# Altium PCB EE02-Module.PcbDoc
Units mm, origin at the board's own origin, x right, y up, seen from the top; angles counter-clockwise.
Board outline 27 x 25.5 mm, 6 copper layers (Top, L2 (GND), L3, L4, L5 (PWR), Bottom), stack 0.956 mm thick; 95 components, 90 nets, 334 pads, 243 vias.
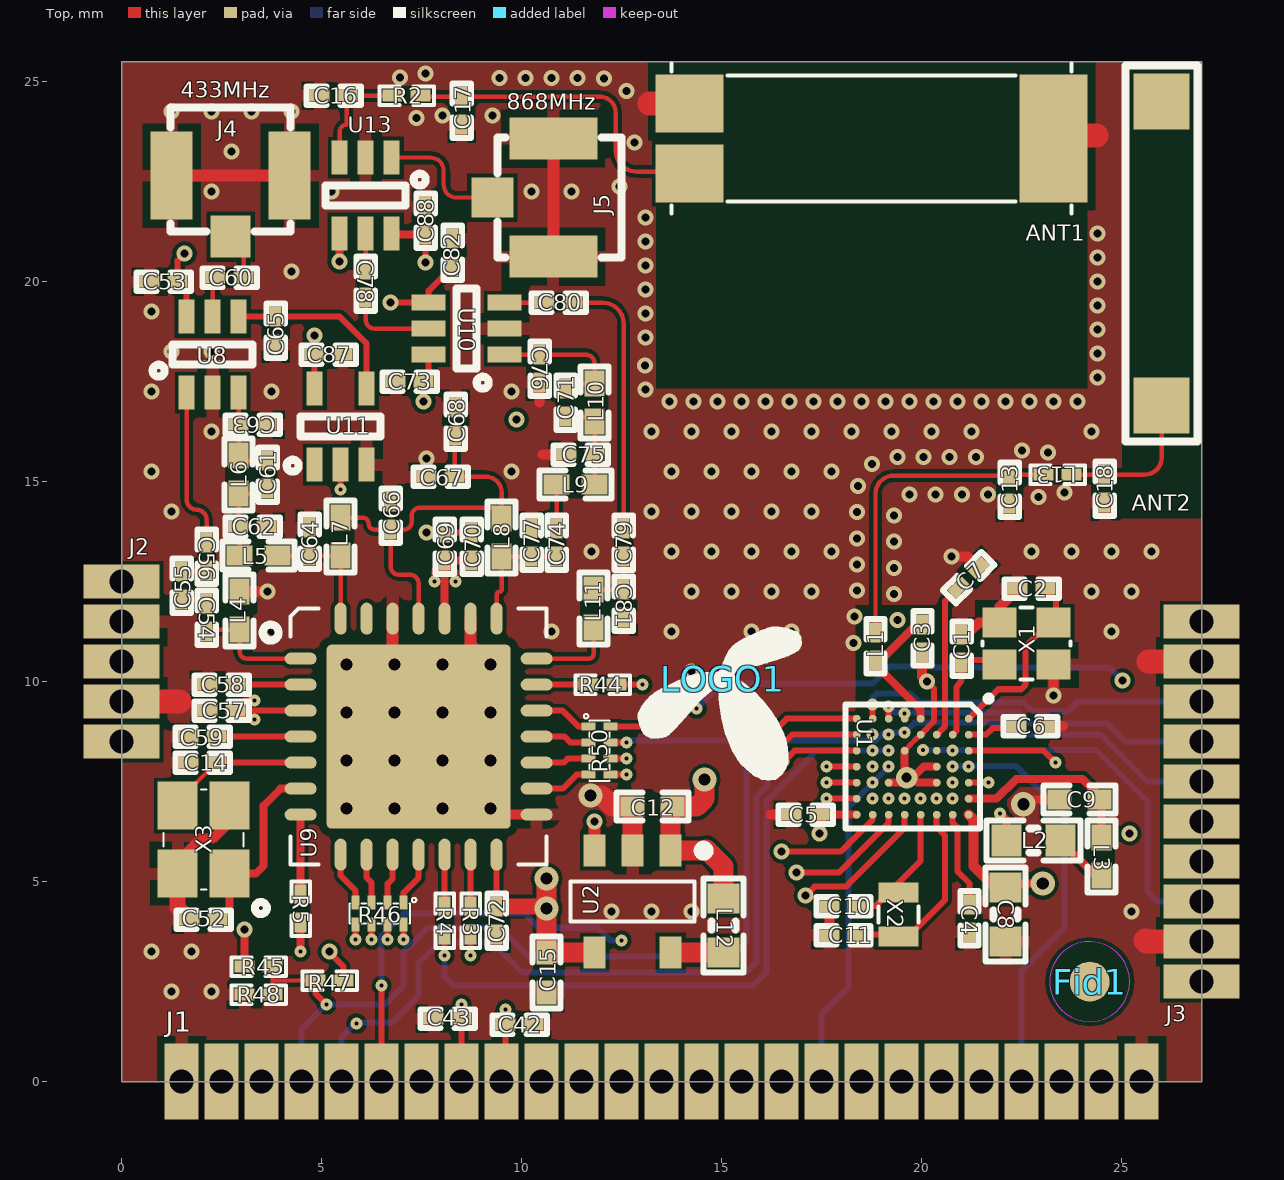
[diagram p0: Top view]
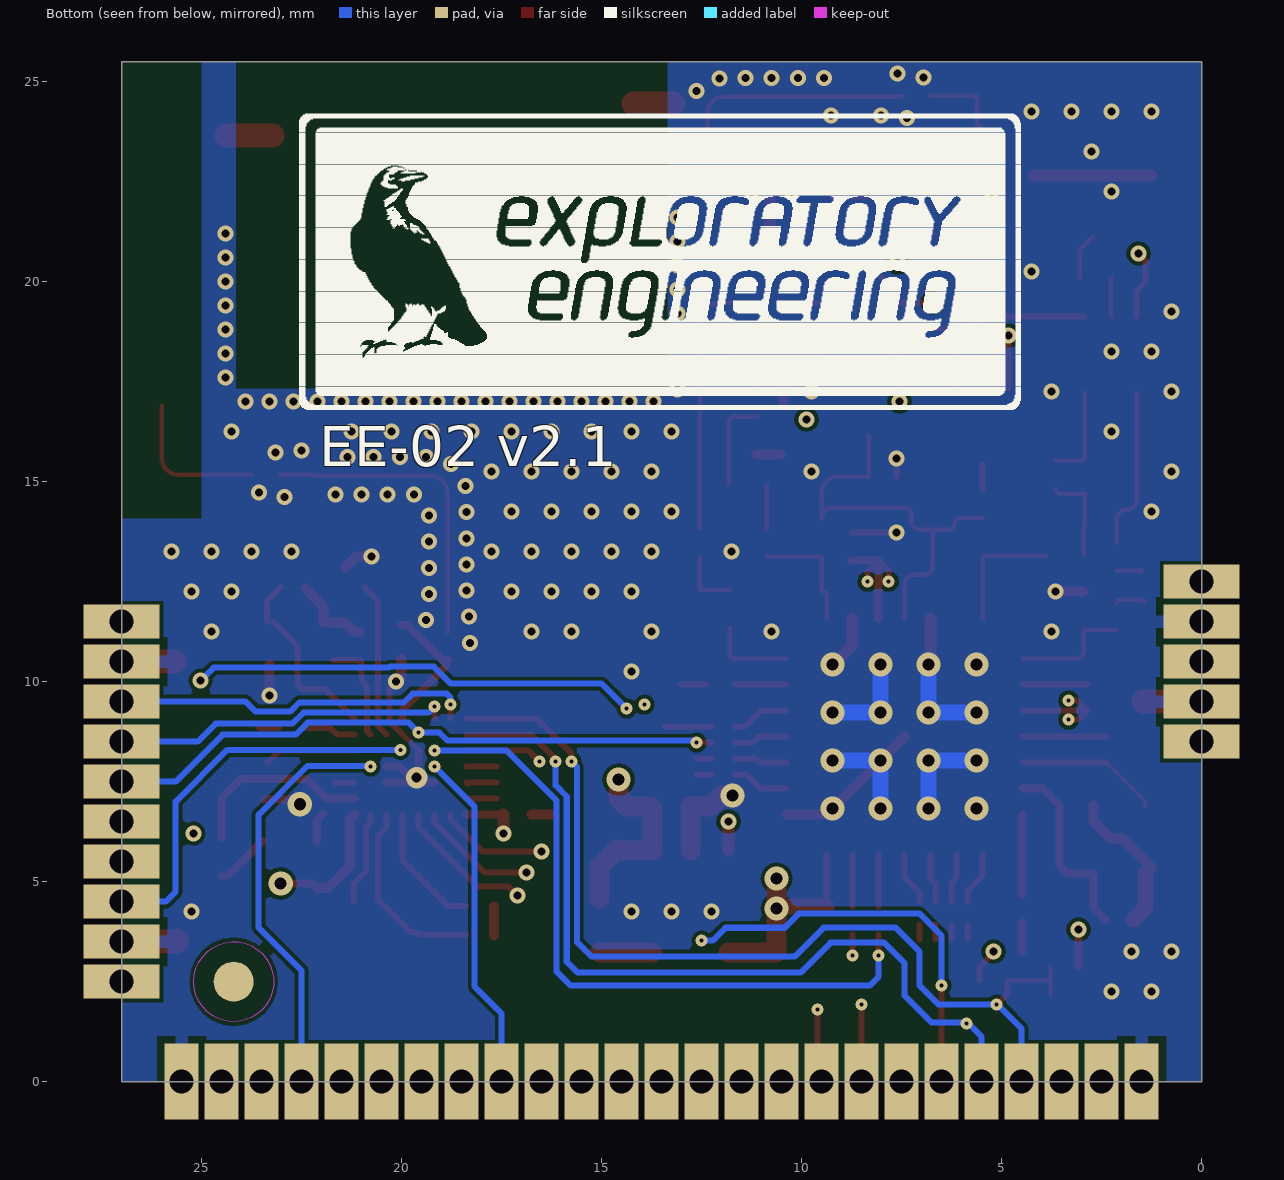
[diagram p1: Bottom view, seen from below]
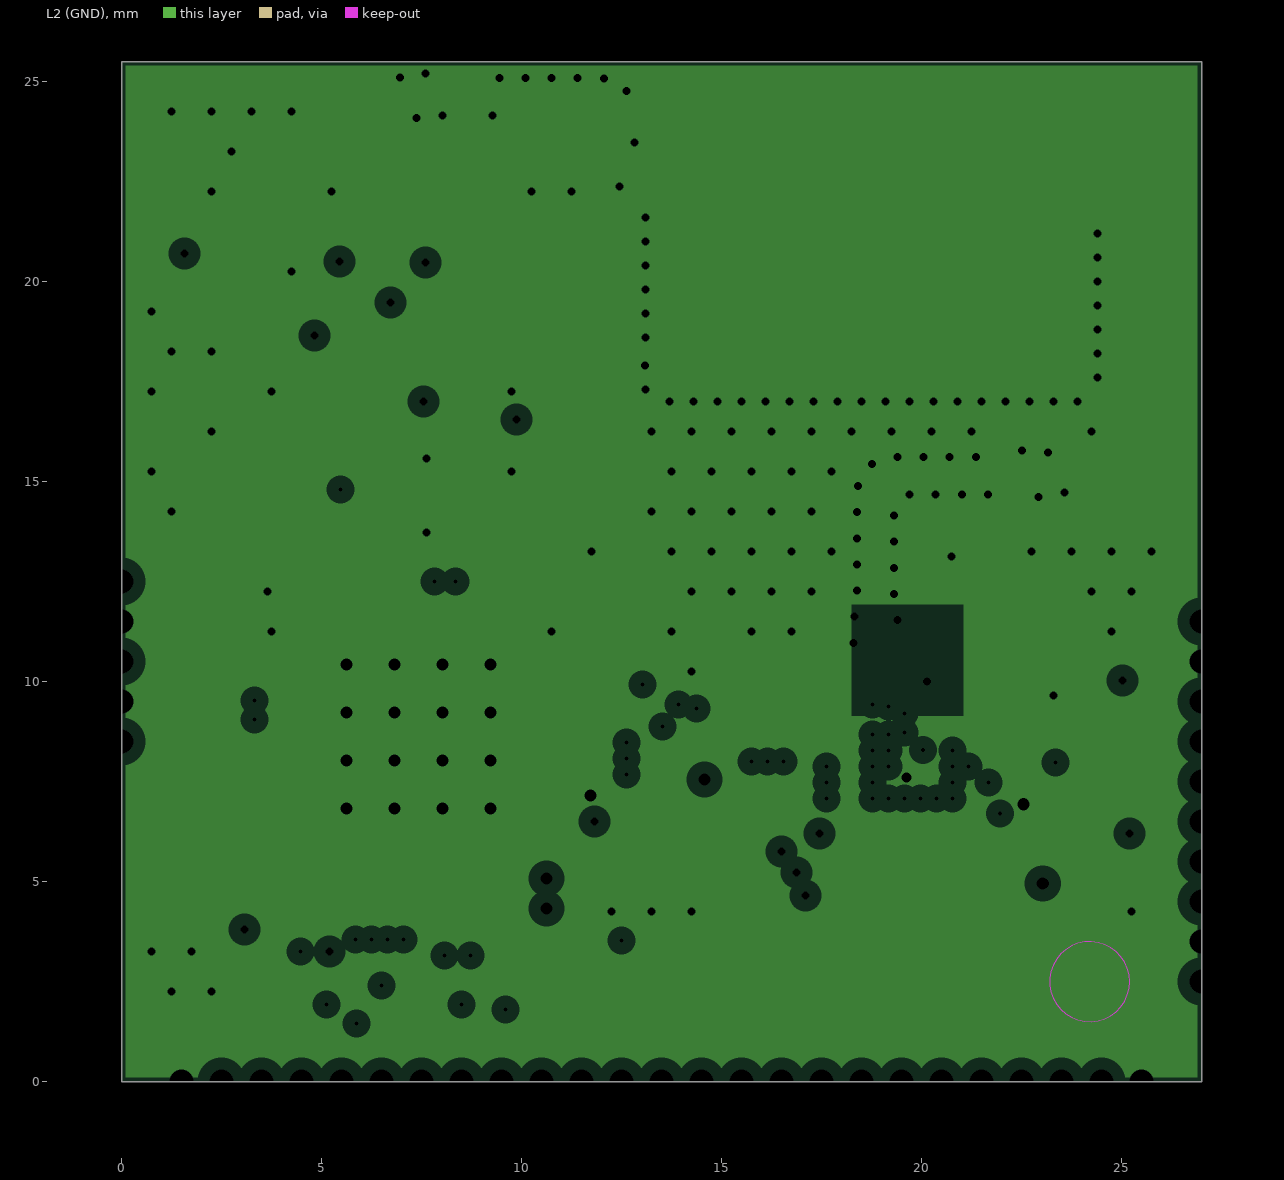
[diagram p2: L2 (GND), clearances drawn from the general rule]
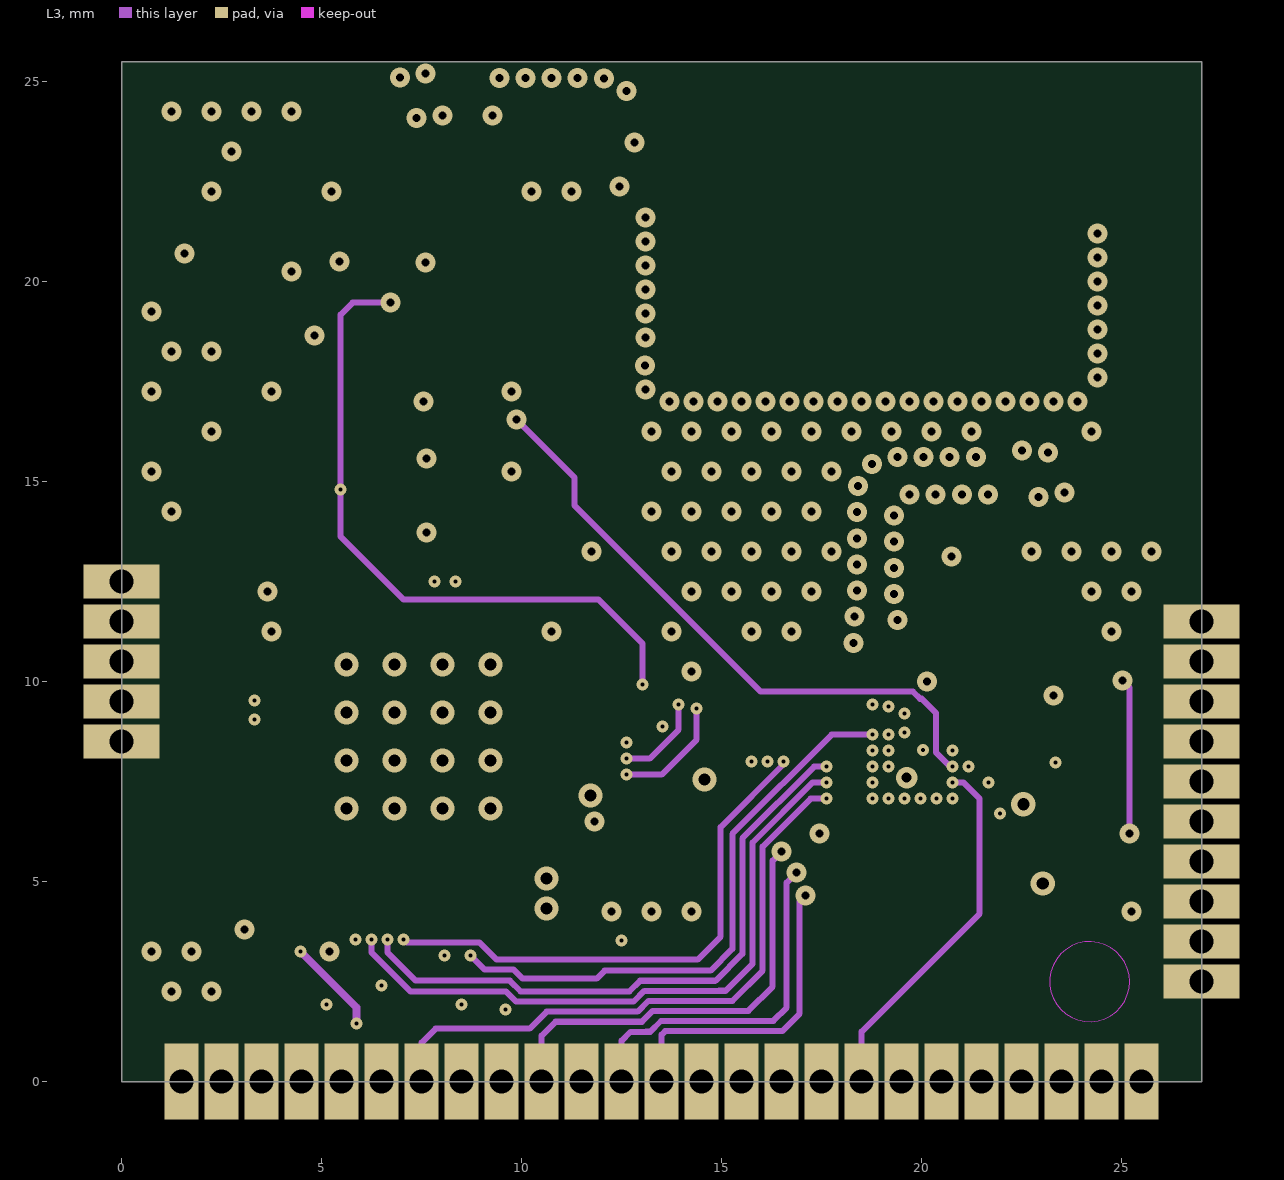
[diagram p3: L3]
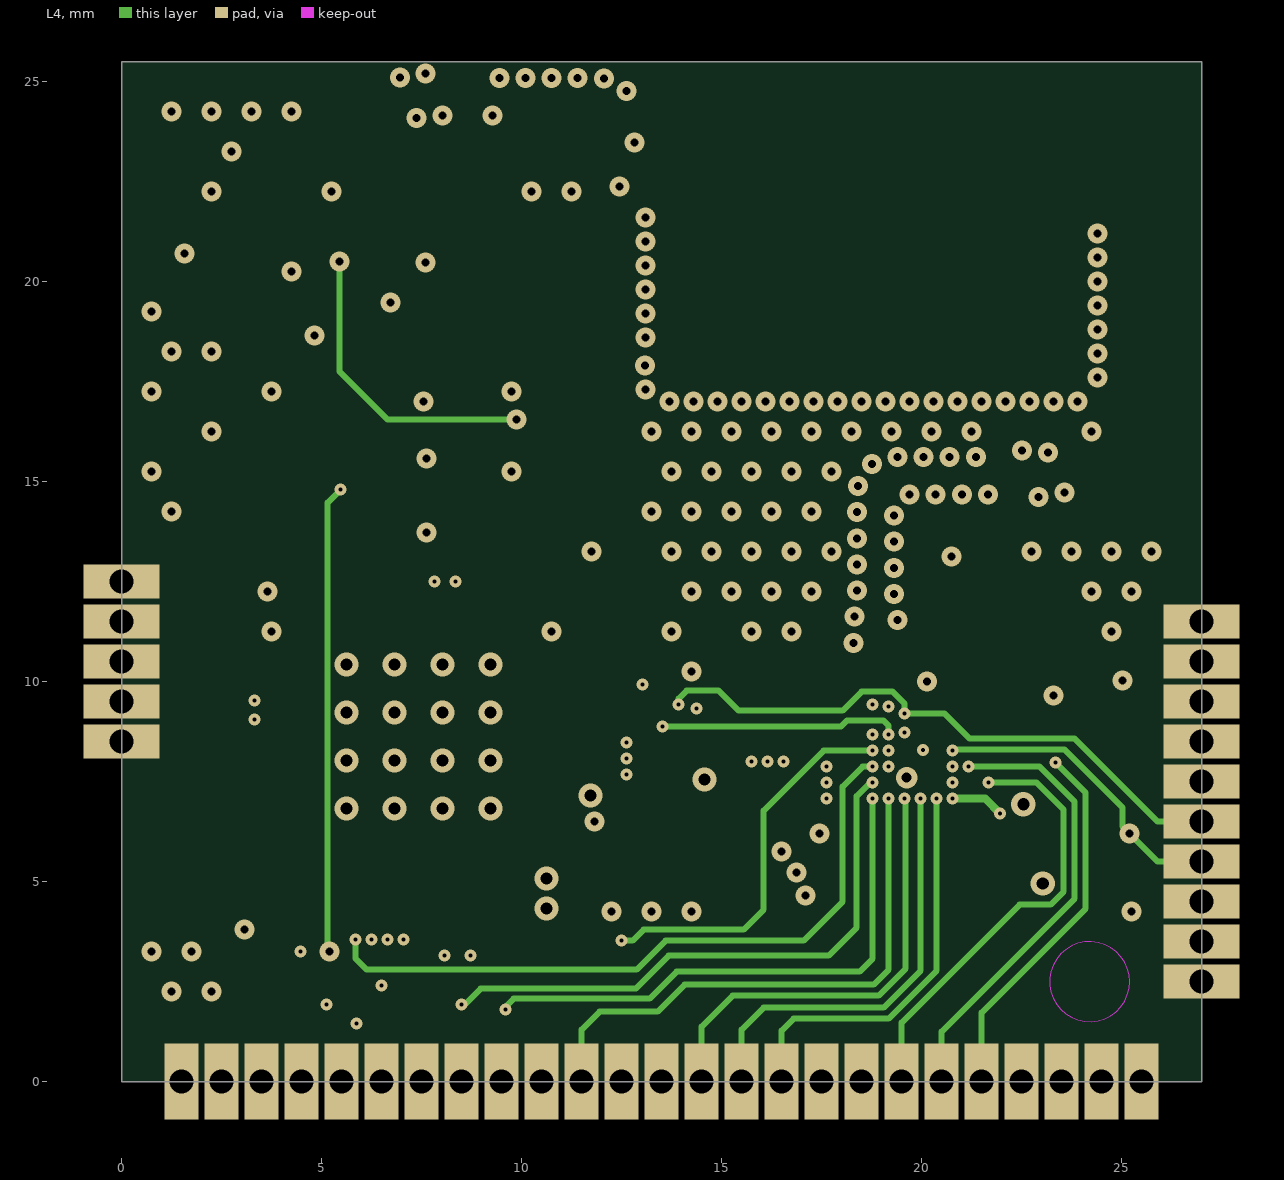
[diagram p4: L4]
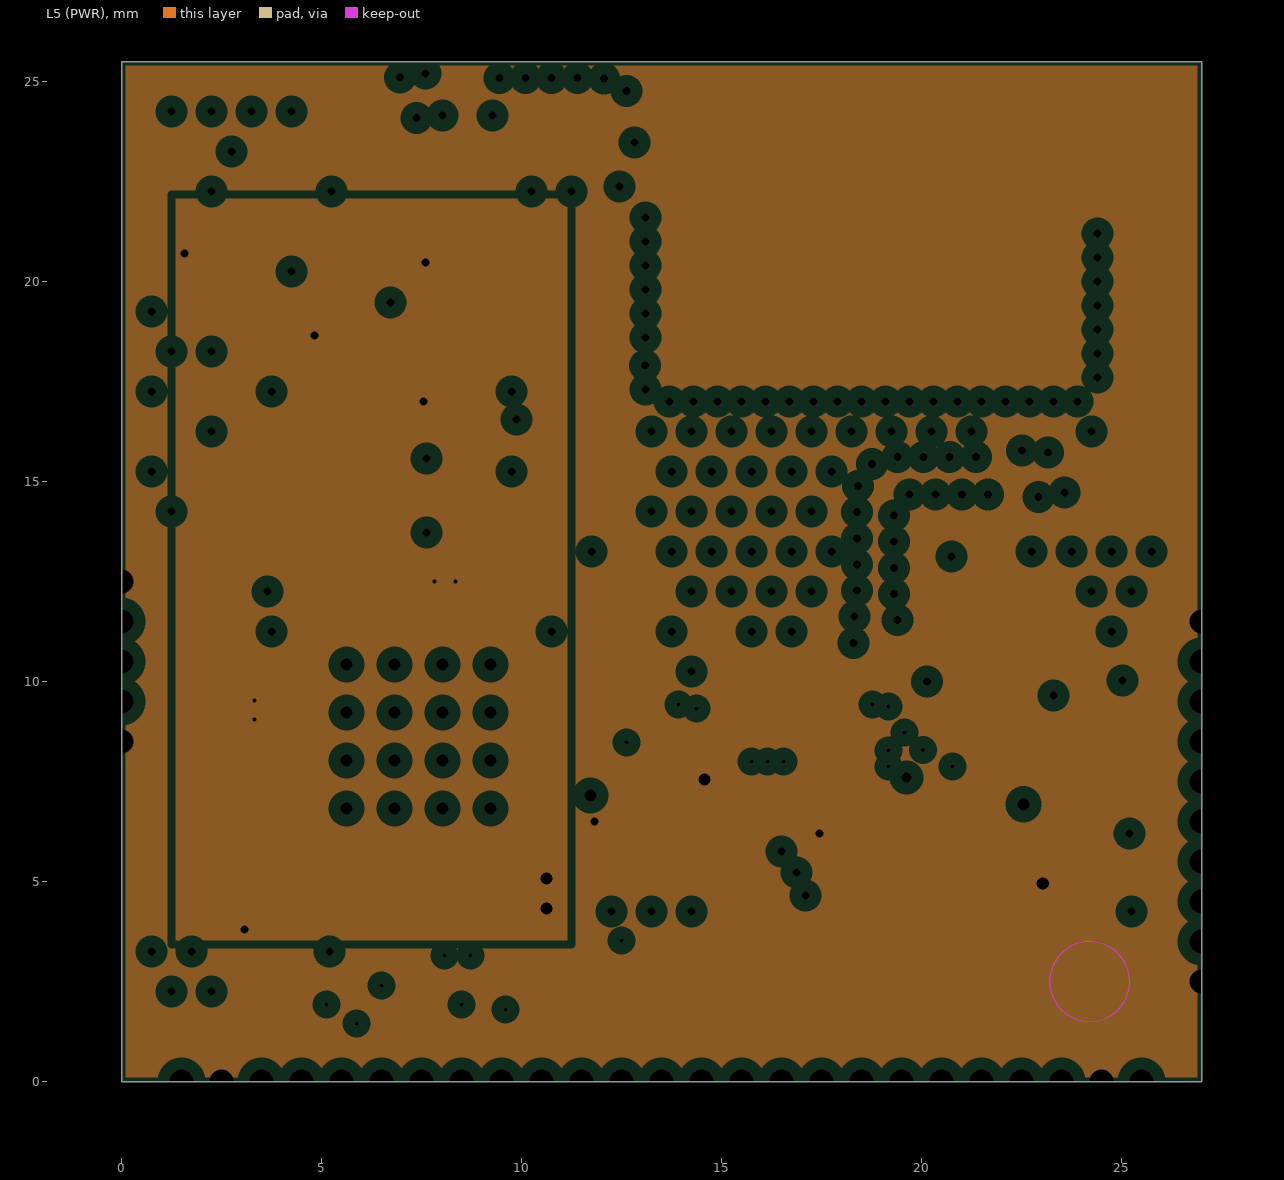
[diagram p5: L5 (PWR), clearances drawn from the general rule]
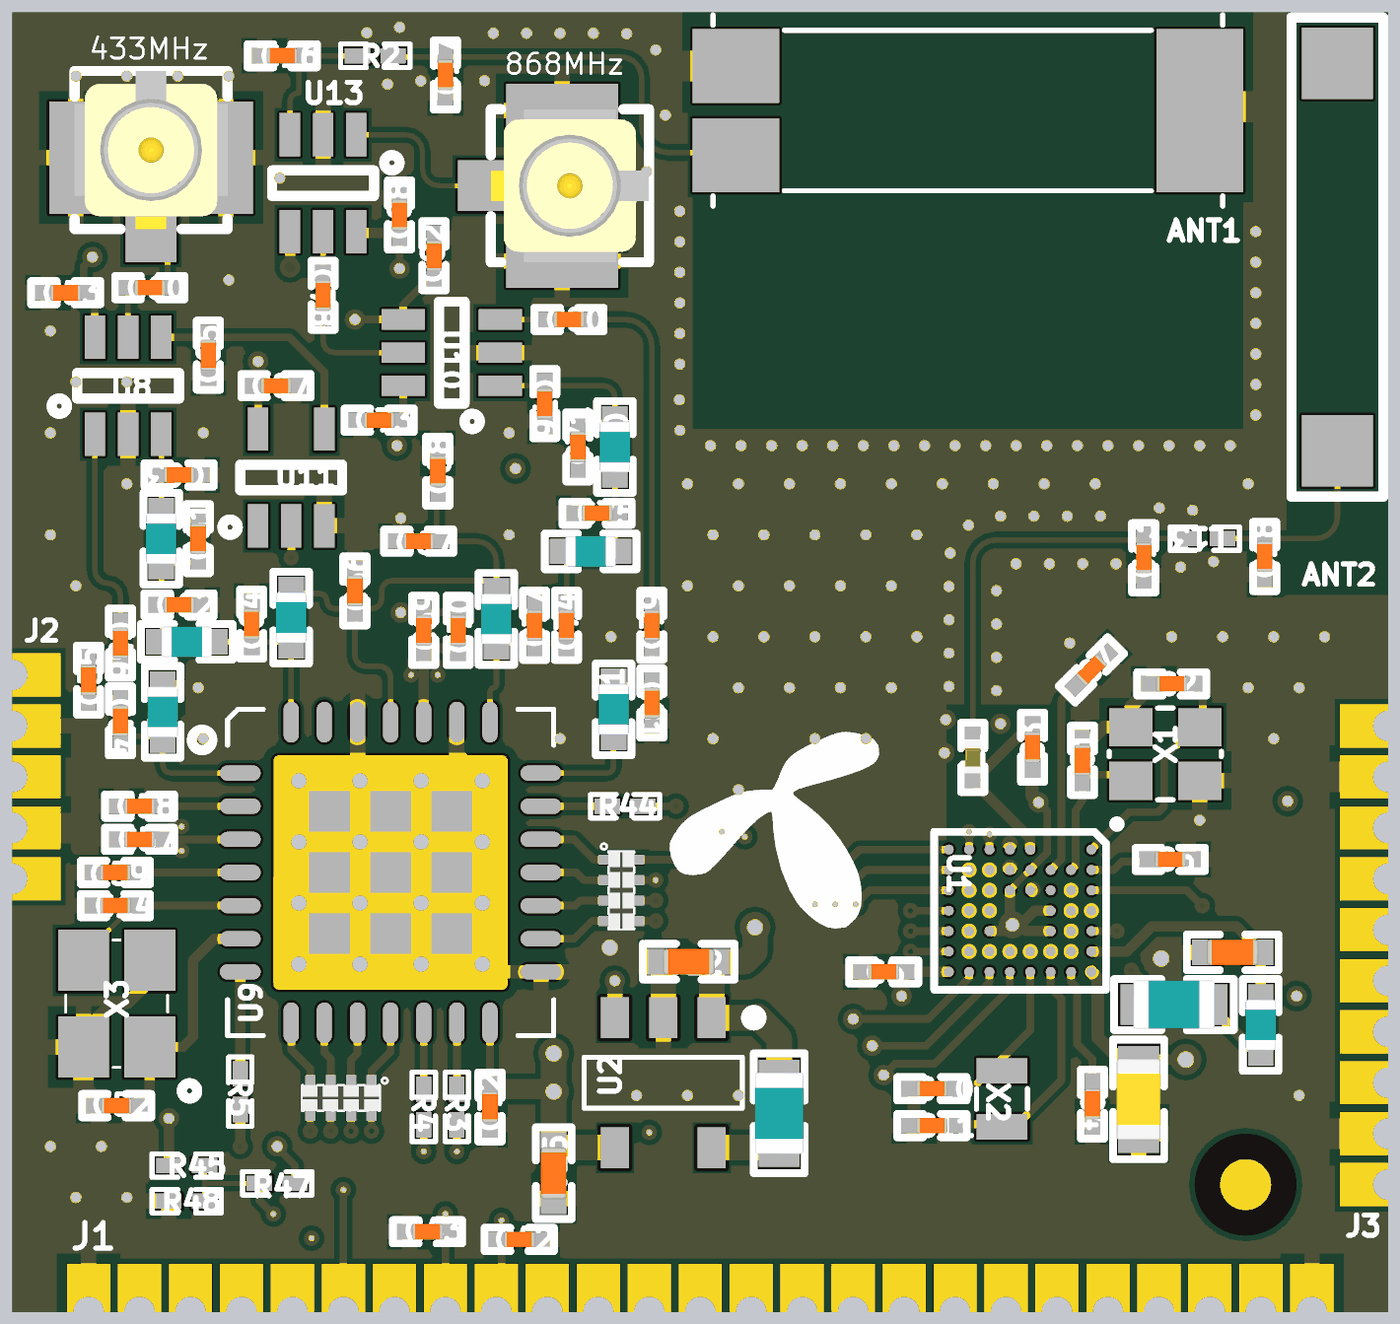
[diagram p6: 3D render of the assembled board from above, using the file's embedded part models]

## Layer stack, top to bottom
Top Solder: solder mask 0.022, Solder Resist, Dk 3.5
Top: signal copper 0.012
Dielectric 1: prepreg 0.075, FR-4, Dk 4.2
L2 (GND): plane copper 0.018, net GND
Dielectric 3: core 0.1, Dk 4.2
L3: signal copper 0.018
Dielectric 4: prepreg 0.51, Dk 4.2
L4: signal copper 0.018
Dielectric 5: core 0.1, Dk 4.2
L5 (PWR): plane copper 0.018, net VDD
Dielectric 6: prepreg 0.075, Dk 4.2
Bottom: signal copper 0.012
Bottom Solder: solder mask 0.022, Solder Resist, Dk 3.5

## Board outline
0,0 27,0 27,25.5 0,25.5

## Design rules (kind name [scope] priority, off if disabled: settings)
Clearance [All] p1: gap=0.1
ComponentClearance [All] p1: gap=0.1 collisioncheckmode=3 verticalgap=0.1 showdistances=FALSE
Height [All] p1 off: minheight=0 maxheight=25.4 prefheight=12.7
HoleSize [All] p1: absolutevalues=TRUE maxlimit=2.54 minlimit=0.1 maxpercent=80.000 minpercent=20.000
HoleToHoleClearance [All] p1 off: gap=0.254 allowstackedmicrovias=TRUE
MinimumSolderMaskSliver [All] p1: minsoldermaskwidth=0.09
PlaneClearance [All] p1: clearance=0.3
PlaneConnect ViaPlaneConnect [IsStitchingVia or IsShieldingVia or (IsVia and Net='GND');] p1: planeconnectstyle=Direct reliefexpansion=0.508 reliefentries=4 reliefconductorwidth=0.254 reliefairgap=0.254
PlaneConnect [All] p2: planeconnectstyle=Direct reliefexpansion=0.3 reliefentries=4 reliefconductorwidth=0.4 reliefairgap=0.15
PolygonConnect ViaPolygonConnect [IsStitchingVia or IsShieldingVia or (IsVia and InNet('GND'));] p1: connectstyle=Direct reliefconductorwidth=0.254 reliefentries=4 polygonreliefangle="90 Angle" airgapwidth=0.254
PolygonConnect [All] p2: connectstyle=Relief reliefconductorwidth=0.3 reliefentries=4 polygonreliefangle="90 Angle" airgapwidth=0.2
RoutingVias [All] p1: holewidth=0.5 width=0.75 viastyle="Through Hole" minholewidth=0.4 minwidth=0.2 maxholewidth=2 maxwidth=4 useviatemplates=TRUE viatemplateguid#1={EC89B0F9-B3F0-4A83-9653-6B650C84F99E} viatemplatename#1=v40h20z50m0mx0
SilkToBoardRegionClearance [All] p1 off:
SilkToSilkClearance [All] p1 off: silktosilkclearance=0.05
SilkToSolderMaskClearance [IsPad] p1 off: minsilkscreentomaskgap=0.1 clearancetoexposedcopper=TRUE
SolderMaskExpansion [All] p1: expansion=0.05
Width IMP_50 [InNetClass('50 Ohm Impedance') or InNetClass('50 ohms impedance');] p1: maxlimit=0.114 minlimit=0.108 preferedwidth=0.114 toplayer_maxwidth=0.108 toplayer_prefwidth=0.108 midlayer1_minwidth=0.114 midlayer2_minwidth=0.114 bottomlayer_maxwidth=0.108 bottomlayer_prefwidth=0.108 impedancedriven=TRUE minimp=50.000000 maximp=50.000000 favimp=50.000000
Width [All] p2: maxlimit=3 minlimit=0.1 preferedwidth=0.1
20 further rules are at their usual default settings.

## Classes and differential pairs
component class "[03] - Inter-connects": C12 C15 L12 U2
component class "[01] - Edge-connections": Fid1 J1 J2 J3 J25 J34 LOGO1
component class "[02] - nRF52": ANT2 C1 C2 C3 C4 C5 C6 C7 C8 C9 C10 C11 C13 C18 C42 C43 L1 L2 L3 L13 P23 U1 X1 X2
component class "[04] - SX1276": ANT1 C14 C16 C17 C52 C53 C54 C55 C56 C57 C58 C59 C60 C61 C62 C63 C64 C65 C66 C67 C68 C69 C70 C71 C72 C73 C74 C75 C76 C77 C78 C79 C80 C81 C82 C87 C88 GND J4 J5 L4 L5 L6 L7 L8 L9 L10 L11 R2 R3 R4 R5 R44 R45 R46 R47 R48 R50 RXTX_RFMDOD U8 U9 U10 U11 U13 VDD_RFS X3
net class "50 ohms impedance": NetANT1_1 NetANT2_1 NetC16_2 NetC54_2 NetC55_1 NetC56_1 NetC60_1 NetC60_2 NetC61_1 NetC61_2 NetC66_2 NetC71_1 NetC71_2 NetC74_1 NetC78_1 NetC78_2 NetC79_1 NetC79_2 NetC80_1 RFI_HF RFI_LF RFO_HF RFO_LF
net class "50 Ohm Impedance": RF

## Components (designator, comment, footprint, x,y, rotation, side; value= is the part's Value field where it differs from the comment)
ANT1 "W3013" PULSE_W3013_R 18.75,21.45 r180 top
ANT2 "ANT8010LL04R2400A" YAGEO_24GHz 26,20.7 r90 top
C1 "12pF" CAPC0603X03L 21,10.825 r90 top
C2 "12pF" CAPC0603X03L 22.75,12.325 r180 top
C3 "1pF" CAPC0603X03L 20.02,11.083 r90 top
C4 "0.10µF" CAPC0603X03L 21.195,4.083 r270 top
C5 "0.10µF" CAPC0603X03L 17.1,6.675 r180 top
C6 "100pF" CAPC0603X03L 22.72,8.883 r0 top
C7 "100pF" CAPC0603X03L 21.175,12.6 r45 top
C8 "4.7µF" CAPC1608X06L 22.1,4.175 r270 top
C9 "1µF" CAPC1005X04L 23.945,7.058 r0 top
C10 "12pF" CAPC0603X03L 18.045,4.383 r180 top
C11 "12pF" CAPC0603X03L 18.045,3.658 r180 top
C12 "10µF" CAPC1005X04L 13.275,6.875 r0 top
C13 "N.C." CAPC0603X03L 22.2,14.8 r90 top
C14 "15pF" CAPC0603X03L 2.025,7.975 r0 top
C15 "10µF" CAPC1005X04L 10.625,2.725 r90 top
C16 "N.C." CAPC0603X03L 5.3,24.65 r0 top
C17 "N.C." CAPC0603X03L 8.5,24.275 r90 top
C18 "N.C." CAPC0603X03L 24.575,14.825 r90 top
C42 "330pF" CAPC0603X03L 9.95,1.425 r0 top
C43 "330pF" CAPC0603X03L 8.15,1.575 r0 top
C52 "15pF" CAPC0603X03L 2.05,4.05 r0 top
C53 "1nF" CAPC0603X03L 1.05,20 r0 top
C54 "4.7pF" CAPC0603X03L 2.125,11.6 r90 top
C55 "47pF" CAPC0603X03L 1.5,12.4 r270 top
C56 "47pF" CAPC0603X03L 2.125,13.125 r270 top
C57 "0.10µF" CAPC0603X03L 2.5,9.275 r0 top
C58 "0.10µF" CAPC0603X03L 2.5,9.925 r0 top
C59 "0.10µF" CAPC0603X03L 2.025,8.625 r0 top
C60 "47pF" CAPC0603X03L 2.7,20.1 r180 top
C61 "2.7pF" CAPC0603X03L 3.65,15.175 r90 top
C62 "6.8pF" CAPC0603X03L 3.275,13.875 r180 top
C63 "6.8pF" CAPC0603X03L 3.275,16.425 r180 top
C64 "4.7pF" CAPC0603X03L 4.7,13.5 r270 top
C65 "1nF" CAPC0603X03L 3.85,18.775 r90 top
C66 "10nF" CAPC0603X03L 6.725,14.15 r270 top
C67 "47pF" CAPC0603X03L 7.975,15.125 r0 top
C68 "47pF" CAPC0603X03L 8.35,16.5 r270 top
C69 "47pF" CAPC0603X03L 8.075,13.375 r270 top
C70 "0.10µF" CAPC0603X03L 8.75,13.375 r270 top
C71 "1.2pF" CAPC0603X03L 11.1,16.975 r90 top
C72 "0.10µF" CAPC0603X03L 9.375,4.025 r90 top
C73 "1nF" CAPC0603X03L 7.2,17.5 r0 top
C74 "33pF" CAPC0603X03L 10.875,13.475 r270 top
C75 "4.7pF" CAPC0603X03L 11.475,15.675 r0 top
C76 "1.8pF" CAPC0603X03L 10.45,17.825 r90 top
C77 "1.5pF" CAPC0603X03L 10.25,13.475 r270 top
C78 "47pF" CAPC0603X03L 6.1,19.95 r270 top
C79 "47pF" CAPC0603X03L 12.55,13.475 r270 top
C80 "47pF" CAPC0603X03L 10.925,19.475 r0 top
C81 "3.3pF" CAPC0603X03L 12.55,11.95 r90 top
C82 "1nF" CAPC0603X03L 8.275,20.725 r270 top
C87 "0.10µF" CAPC0603X03L 5.175,18.175 r180 top
C88 "1nF" CAPC0603X03L 7.6,21.525 r270 top
Fid1 "Fiducial mark" Fiducial 24.2,2.5 r90 top
J1 "1.0mm" EDGE_MULTI_25 13.5,0 r0 top
J2 "1.0mm" EDGE_MULTI_5 0,10.5 r90 top
J3 "1.0mm" EDGE_MULTI_10 27,7 r90 top
J4 "U.FL-R-SMT-1(10)" COAXIAL-UFL 2.725,22.65 r0 top
J5 "U.FL-R-SMT-1(10)" COAXIAL-UFL 10.792,22.1 r270 top
L1 "3.3nH" INDC0603X03L 18.845,10.883 r90 top
L2 "10µH" INDC1608X06L 22.795,6.033 r180 top
L3 "15nH" INDC1005X04L 24.495,5.633 r270 top
L4 "18nH" INDC1005X04L 2.95,11.775 r270 top
L5 "15nH" INDC1005X04L 3.425,13.15 r180 top
L6 "12nH" INDC1005X04L 2.925,15.175 r90 top
L7 "82nH" INDC1005X04L 5.475,13.625 r270 top
L8 "33nH" INDC1005X04L 9.5,13.6 r90 top
L9 "10nH" INDC1005X04L 11.35,14.925 r0 top
L10 "6.2nH" INDC1005X04L 11.825,16.975 r90 top
L11 "10nH" INDC1005X04L 11.8,11.825 r90 top
L12 "4.7µH" INDC1608X06L 15.05,3.9 r270 top
L13 "0.0" RESC0603X03L 23.4,15.175 r0 top
LOGO1 "TELENOR_LOGO" TELENOR_4mmx3.8mm 15.025,10.075 r0 top
R2 "0.0" RESC0603X03L 7.125,24.65 r0 top
R3 "100" RESC0603X03L 8.725,4.025 r270 top
R4 "100" RESC0603X03L 8.075,4.025 r270 top
R5 "100" RESC0603X03L 4.475,4.325 r270 top
R44 "N.C." RESC0603X03LNC 12.025,9.925 r0 top
R45 "N.C." RESC0603X03LNC 3.425,2.875 r180 top
R46 "100" EXB18V 6.45,4.2 r180 top
R47 "100" RESC0603X03L 5.2,2.525 r0 top
R48 "1k" RESC0603X03L 3.425,2.175 r180 top
R50 "100" EXB18V 11.95,8.275 r270 top
U1 "NRF52832-CIAA-R" BGA50C40P7X8_295X322X50 19.775,7.875 r270 top locked
U2 "TPS61097A-33DBVR" SOT95P280X145-5L 12.775,4.5 r270 top
U8 "4259-63" SC70-6 2.275,18.175 r90 top
U9 "SX1276IMLTRT" vqfn28_6x6mm 7.425,8.625 r0 top
U10 "4259-63" SC70-6 8.625,18.825 r180 top
U11 "NC7SZ04P5X" SC70-5 5.475,16.375 r90 top
U13 "4259-63" SC70-6 6.1,22.15 r270 top
X1 "32MHz" XTAL_ECS_2016 22.625,10.95 r0 top
X2 "32.768kHz" XTAL_1610 19.42,4.183 r270 top
X3 "32MHz" nd2520da 2.05,6.05 r90 top

## Footprints (in the part's own frame and the unit in brackets; to place one, negate y for a bottom-side part, rotate by r counter-clockwise, add the part's x,y. Pads: shape width x height; smd on the part's side, far side on the other; paste and mask are expansions set on the pad)
BGA50C40P7X8_295X322X50 [mm] "BGA, 50-Leads, Body 2.95x3.22mmx0.50mm, Pitch 0.40mm"
  round 0.193 smd: A1(-1.2,1.4) A2(-0.8,1.4) A3(-0.4,1.4) A4(0,1.4) A5(0.4,1.4) A6(0.8,1.4) A7(1.2,1.4) B2(-0.8,1) B3(-0.4,1) B4(0,1) B5(0.4,1) B6(0.8,1) B7(1.2,1) C2(-0.8,0.6) C3(-0.4,0.6) C4(0,0.6) C5(0.4,0.6) C6(0.8,0.6) C7(1.2,0.6) D1(-1.2,0.2) D2(-0.8,0.2) D3(-0.4,0.2) D6(0.8,0.2) D7(1.2,0.2) E1(-1.2,-0.2) E2(-0.8,-0.2) E3(-0.4,-0.2) E6(0.8,-0.2) E7(1.2,-0.2) F1(-1.2,-0.6) F2(-0.8,-0.6) F3(-0.4,-0.6) F4(0,-0.6) F5(0.4,-0.6) F6(0.8,-0.6) F7(1.2,-0.6) G1(-1.2,-1) G2(-0.8,-1) G3(-0.4,-1) G4(0,-1) G5(0.4,-1) G6(0.8,-1) G7(1.2,-1) H1(-1.2,-1.4) H2(-0.8,-1.4) H3(-0.4,-1.4) H4(0,-1.4) H5(0.4,-1.4) H6(0.8,-1.4) H7(1.2,-1.4)
  silkscreen extent -1.75,-1.69 1.55,1.95, body extent -1.48,-1.61 1.48,1.61, height 0.51
CAPC0603X03L [mm]
  rect 0.5x0.3 smd: 1(-0.35,0) 2(0.35,0)
  silkscreen extent -0.68,-0.23 0.68,0.23, body extent -0.3,-0.15 0.31,0.15, height 0.3
CAPC1005X04L [mm]
  rect 0.6x0.5 smd: 1(-0.5,0) 2(0.5,0)
  silkscreen extent -0.9,-0.35 0.9,0.35, body extent -0.51,-0.25 0.51,0.25, height 0.5
CAPC1608X06L [mm]
  rect 0.75x0.8 smd: 1(-0.675,0) 2(0.675,0)
  silkscreen extent -1.17,-0.5 1.17,0.5, body extent -0.8,-0.43 0.8,0.43, height 0.8
COAXIAL-UFL [mm] "U.FL-R-SMT"
  rect 1x1.05 smd: 1(0,-1.525)
  rect 1.05x2.2 smd: 2(-1.475,0) 2(1.475,0)
  silkscreen extent -1.5,-1.4 1.5,1.7, body extent -1.5,-1.4 1.5,1.7, height 1.25
EDGE_MULTI_5 [mm] "5xEdge connector with via"
  rect 0.85x1.9 hole 0.6 mask+0.01: 1(-2,0) 2(-1,0) 3(0,0) 4(1,0) 5(2,0)
EDGE_MULTI_10 [mm] "10xEdge connector with via"
  rect 0.85x1.9 hole 0.6 mask+0.01: 1(-4.5,0) 2(-3.5,0) 3(-2.5,0) 4(-1.5,0) 5(-0.5,0) 6(0.5,0) 7(1.5,0) 8(2.5,0) 9(3.5,0) 10(4.5,0)
EDGE_MULTI_25 [mm] "25xEdge connector with via"
  rect 0.85x1.9 hole 0.6 mask+0.01: 1(-12,0) 2(-11,0) 3(-10,0) 4(-9,0) 5(-8,0) 6(-7,0) 7(-6,0) 8(-5,0) 9(-4,0) 10(-3,0) 11(-2,0) 12(-1,0) 13(0,0) 14(1,0) 15(2,0) 16(3,0) 17(4,0) 18(5,0) 19(6,0) 20(7,0) 21(8,0) 22(9,0) 23(10,0) 24(11,0) 25(12,0)
EXB18V [mm] "EXB18V, 4x100 ohm, 0502 / 1406 size"
  rect 0.2x0.35 smd mask+0.01: 1(-0.6,-0.275) 2(-0.2,-0.275) 3(0.2,-0.275) 4(0.6,-0.275) 5(0.6,0.275) 6(0.2,0.275) 7(-0.2,0.275) 8(-0.6,0.275)
  silkscreen extent -0.92,-0.4 0.76,0.25, body extent -0.76,-0.25 0.76,0.25, height 0.46
Fiducial [mm]
  round 1 smd paste-10 mask+0.5: 0(0,0)
  round 1 smd far side paste-10 mask+0.5: 0(0,0)
  Keep-Out Layer circle w0.01: c0,0 r1
INDC0603X03L [mm]
  rect 0.5x0.3 smd: 1(-0.35,0) 2(0.35,0)
  silkscreen extent -0.68,-0.23 0.68,0.23, body extent -0.31,-0.16 0.31,0.16, height 0.26
INDC1005X04L [mm]
  rect 0.65x0.5 smd: 1(-0.475,0) 2(0.475,0)
  silkscreen extent -0.9,-0.35 0.9,0.35, body extent -0.5,-0.3 0.5,0.3, height 0.5
INDC1608X06L [mm]
  rect 0.75x0.8 smd: 1(-0.675,0) 2(0.675,0)
  silkscreen extent -1.17,-0.5 1.18,0.5, body extent -0.8,-0.48 0.8,0.48, height 0.8
nd2520da [mm] "Crystal SMD 2.5x2.0mm"
  rect 1.2x1 smd mask+0.05: 1(-0.85,-0.65) 2(0.85,-0.65) 3(0.85,0.65) 4(-0.85,0.65)
  silkscreen extent -1.86,-1.58 1.25,1, body extent -1.25,-1 1.25,1, height 1
PULSE_W3013_R [mm] "Pulse W3013 Antenna, 868 MHz, Bottom Right Feed"
  rect 1.7x1.45 smd mask+0.05: 1(4.55,-1.25) 2(4.55,-3)
  rect 1.7x3.2 smd mask+0.05: 3(-4.55,-2.125)
  silkscreen extent -5,-4 5,-0.25, body extent -5,-3.7 5,-0.55, height 4
RESC0603X03L [mm] "Chip Resistor, 2-Leads, Body 0,60x0,30mm, IPC High Density"
  rect 0.5x0.3 smd: 1(-0.35,0) 2(0.35,0)
  silkscreen extent -0.68,-0.23 0.68,0.23, body extent -0.32,-0.16 0.32,0.17, height 0.3
RESC0603X03LNC [mm] "Chip Resistor, 0201 (0603 metric) - Not mounted"
  rect 0.5x0.3 smd: 1(-0.35,0) 2(0.35,0)
  silkscreen extent -0.68,-0.23 0.68,0.23
SC70-5 [mm] "SC70 5-Leads, Body 2.0x1.25mm, Pitch 0.65mm"
  rect 0.85x0.4 smd mask+0.05: 1(-0.95,0.65) 2(-0.95,0) 3(-0.95,-0.65) 4(0.95,-0.65) 5(0.95,0.65)
  silkscreen extent -1.12,-1 0.25,1.35, body extent -0.63,-1 0.63,1, height 1.45
SC70-6 [mm] "SC70 6-Leads, Body 2.0x1.25mm, Pitch 0.65mm"
  rect 0.85x0.4 smd mask+0.05: 1(-0.95,0.65) 2(-0.95,0) 3(-0.95,-0.65) 4(0.95,-0.65) 5(0.95,0) 6(0.95,0.65)
  silkscreen extent -0.55,-1 0.25,1.5, body extent -0.63,-1 0.63,1, height 1.45
SOT95P280X145-5L [mm] "SOT23, 5-Leads, Body 2,90x2,80mm, Pitch 0,95mm, IPC High Density"
  rect 0.8x0.55 smd mask+0.07: 1(-1.275,0.95) 2(-1.275,0) 3(-1.275,-0.95) 4(1.275,-0.95) 5(1.275,0.95)
  silkscreen extent -1.4,-1.55 0.5,1.9, body extent -0.88,-1.52 0.88,1.53, height 1.45
TELENOR_4mmx3.8mm [mm] "Telenor Logo, 4mm x 3.8mm (W x H)"
  silkscreen extent -2.07,-2.5 1.93,1.26
vqfn28_6x6mm [mm] "28 Leads, Body 6.0x6.0mm, Pitch 0.65mm, VQFN28"
  oval 0.8x0.3 smd mask+0.05: 1(-2.95,1.95) 2(-2.95,1.3) 3(-2.95,0.65) 4(-2.95,0) 5(-2.95,-0.65) 6(-2.95,-1.3) 7(-2.95,-1.95) 15(2.95,-1.95) 16(2.95,-1.3) 17(2.95,-0.65) 18(2.95,0) 19(2.95,0.65) 20(2.95,1.3) 21(2.95,1.95)
  oval 0.3x0.8 smd mask+0.05: 8(-1.95,-2.95) 9(-1.3,-2.95) 10(-0.65,-2.95) 11(0,-2.95) 12(0.65,-2.95) 13(1.3,-2.95) 14(1.95,-2.95) 22(1.95,2.95) 23(1.3,2.95) 24(0.65,2.95) 25(0,2.95) 26(-0.65,2.95) 27(-1.3,2.95) 28(-1.95,2.95)
  rrect5% 4.6x4.6 smd paste-3.3 mask+0.05: 29(0,0)
  Mechanical 15 keep-out lines w0.1: -3.5,-3.5 3.5,-3.5 3.5,3.5 -3.5,3.5 -3.5,-3.5
  silkscreen extent -3.9,-3.2 3.2,3.2, body extent -3,-3 3,3, height 1
XTAL_1610 [mm] "Crystal, 1.6x1.0mm, 1610"
  rect 0.5x1 smd mask+0.05: 1(-0.55,0) 2(0.55,0)
  silkscreen extent -0.2,-0.5 0.2,0.5, body extent -0.8,-0.5 0.8,0.5, height 0.5
XTAL_ECS_2016 [mm]
  rect 0.85x0.75 smd mask+0.05: 1(-0.675,-0.525) 2(0.675,-0.525) 3(0.675,0.525) 4(-0.675,0.525)
  silkscreen extent -1.1,-0.9 1.1,0.9, body extent -1,-0.8 1,0.8, height 0.45
YAGEO_24GHz [mm] "Yageo 2.4GHz Chip Antenna"
  rect 1.4x1.4 smd mask+0.05: 1(-3.8,0)
  rect 1.4x1.4 smd: NC(3.8,0)
  silkscreen extent -4.7,-0.9 4.7,0.9, body extent -4,-0.5 4,0.5, height 1

## Part data
ANT1: "ANTENNA CERAMIC ISM 868MHZ"
ANT2: "CHIP ANTENNA 2.4GHZ"
C1 C2 C10 C11: library part GRM0335C1H120GA01D, "CAP CER 12PF 50V NP0 0201"
C3: library part GRM0335C1H1R0BA01D, "CAP CER 1PF 50V NP0 0201"
C4 C5 C57 C58 C59 C70 C72 C87: library part GRM033R61C104KE84D, "CAP CER 0.1UF 16V X5R 0201"
C6 C7: library part GRM0335C1H101GA01D, "CAP CER 100PF 50V NP0 0201"
C8: library part GRM188R60J475KE19D, "CAP CER 4.7UF 6.3V X5R 0603"
C9: library part GRM155R70J105KA12D, "CAP CER 1UF 6.3V X7R 0402"
C12 C15: library part GRM155R60J106ME15D, "CAP CER 10UF 6.3V X5R 0402"
C13 C16 C17 C18: library part CAP_0201-NC, "Capacitor, 0201, N.C."
C14 C52: library part GRM0335C1H150GA01D, "CAP CER 15PF 50V NP0 0201"
C42 C43: library part GRM033R71C331KA01D, "CAP CER 330PF 16V X7R 0201"
C53 C65 C73 C82 C88: library part GRM033R71H102KA12D, "CAP CER 1NF 50V X7R 0201"
C54 C64 C75: library part GRM0335C1H4R7BA01D, "CAP CER 4.7PF 50V NP0 0201"
C55 C56 C60 C67 C68 C69 C78 C79 C80: library part GRM0335C1H470JA01D, "CAP CER 47PF 50V NP0 0201"
C61: library part GRM0335C1H2R7BA01D, "CAP CER 2.7PF 50V NP0 0201"
C62 C63: library part GRM0335C1H6R8CA01D, "CAP CER 6.8PF 50V NP0 0201"
C66: library part GRM033R61E103KA12D, "CAP CER 10NF 25V X5R 0201"
C71: library part GRM0335C1H1R2BA01D, "CAP CER 1.2PF 50V NP0 0201"
C74: library part GRM0335C1H330GA01D, "CAP CER 33PF 50V NP0 0201"
C76: library part GRM0335C1H1R8BA01D, "CAP CER 1.8PF 50V NP0 0201"
C77: library part GRM0335C1H1R5BA01D, "CAP CER 1.5PF 50V NP0 0201"
C81: library part GRM0335C1H3R3BA01D, "CAP CER 3.3PF 50V NP0 0201"
Fid1: library part Fiducial, "Fiducial Mark"
J1: library part EDGE_MULTI_25_P_1mm, "Edge Connector, 25 pins, 1mm pitch"
J2: library part EDGE_MULTI_5_P_1mm, "Edge Connector, 5 pins, 1mm pitch"
J3: library part EDGE_MULTI_10_P_1mm, "Edge Connector, 10 pins, 1mm pitch"
J4 J5: "CONN UMC JACK STR 50 OHM SMD"
L1: library part LQP03TN3N3B02D, "FIXED IND 3.3NH 450MA 250 MOHM"
L2: library part LBMF1608T100K, "FIXED IND 10UH 80MA 360 MOHM SMD"
L3: library part HK100515NJ-T, "FIXED IND 15NH 320MA 460 MOHM"
L4: library part LQG15HS18NJ02D, "FIXED IND 18NH 300MA 360 MOHM"
L5: library part LQG15HS15NJ02D, "FIXED IND 15NH 300MA 320 MOHM"
L6: library part LQG15HS12NJ02D, "FIXED IND 12NH 300MA 280 MOHM"
L7: library part LQG15HS82NJ02D, "FIXED IND 82NH 150MA 1.2 OHM SMD"
L8: library part LQW15AN33NJ00D, "FIXED IND 33NH 260MA 630 MOHM"
L9 L11: library part LQG15HS10NJ02D, "FIXED IND 10NH 300MA 260 MOHM"
L10: library part LQG15HS6N2S02D, "FIXED IND 6.2NH 300MA 220 MOHM"
L12: library part MLZ1608M4R7WT000, "FIXED IND 4.7UH 350MA 500 MOHM"
L13 R2: library part RC0201FR-070RL, "RES SMD 0.0OHM JUMPER 1/20W 0201"
R3 R4 R5 R47: library part RC0201FR-07100RL, "RES SMD 100 OHM 1% 1/20W 0201"
R44 R45: library part RES_0201, "Not mounted"
R46 R50: library part EXB-18V101JX, "RES ARRAY 4 RES 100 OHM 0502"
R48: library part RC0201FR-071KL, "RES SMD 1K OHM 1% 1/20W 0201"
U1: "nRF52832-CIAA - IC RF TXRX+MCU BLUETOOTH 50WLCSP"
U2: "IC REG BST 3.3V 0.2A SYNC SOT23"
U8 U10 U13: "IC RF SWITCH SPDT 50 OHM SC70-6"
U9: "IC 137-1050MHX TXRX"
U11: "IC INVERTER UHS SINGLE SC70-5"
X1: library part ECS-320-8-37CKM, "CRYSTAL 32.0000MHZ 8PF SMD"
X2: library part 9HT12-32.768KBZC-T, "CRYSTAL 32.7680KHZ 9PF SMD"
X3: library part NX2520SA-32.000000MHZ, "CRYSTAL 32.0000MHZ 10PF SMD"

## Via types
v1: diameter 0.4/0.5/0.5/0.4 (per signal layer), hole 0.2, Top to Bottom, tented both sides, 163 vias
v2: diameter 0.3, hole 0.1, Top to Bottom, tented both sides, 25 vias
v3: diameter 0.6, hole 0.3, Top to Bottom, tented both sides, 20 vias
v4: diameter 0.3, hole 0.1, Top to L4, tented top, 19 vias
v5: diameter 0.3, hole 0.1, Top to L4, tented both sides, 12 vias
v6: diameter 0.61, hole 0.305, Top to Bottom, tented both sides, 2 vias
v7: diameter 0.4/0.5/0.5 (per signal layer), hole 0.2, Top to L4, tented top, 1 vias
v8: diameter 0.533, hole 0.25, Top to Bottom, tented both sides, 1 vias

## Nets (pads, with @x,y where several pads share a name; then routed paths per layer and width w, separated by ;. In a path a pad name is that pad's centre, name@x,y a point inside that pad or via, vN(x,y) a via of type N, cw(c..) or ccw(c..) an arc to the next point about the centre after c; other vN are vias at no path point)
DCC: L2.2 U1.B6 | length 2.1
  Top w0.203: v4(21.959,6.707) 22.123,6.543 L2.2@22.123,6.021
  L4 w0.203: v5(20.775,7.075) 21.591,7.075 v4(21.959,6.707)
DEC1: C4.1 U1.B7 | length 2.3
  Top w0.152: U1.B7 20.775,6.478 20.893,6.36 20.893,5.259 21.197,4.954 C4.1@21.197,4.517
DEC2: C6.1 U1.A2 | length 1.3
  Top w0.152: U1.A2 21.609,8.675 21.774,8.84 C6.1@22.397,8.84
DEC3: C7.1 U1.C2 | length 3.9
  Top w0.152: U1.C2 20.588,8.888 20.588,12.013 C7.1
DEC4: C9.2 L3.1 U1.A6 | length 4.7
  Top w0.203: U1.A6 21.875,7.075 22.366,7.566 24.021,7.566 24.499,7.088 L3.1@24.499,6.104
DIO0: R46.5 U1.G4 | length 17.7
  Top w0.15: v4(5.85,3.55) R46.5
  L4 w0.152: v4(5.85,3.55) 5.85,3.075 6.125,2.8 12.875,2.8 13.6,3.525 17.05,3.525 18.025,4.5 18.025,7.375 18.525,7.875 v5(18.775,7.875)
DIO0_SX: R46.4 U9.8 | length 1.4
  Top w0.15: U9.8 5.475,5.15 5.85,4.775 R46.4
DIO1: R46.6 U1.H5 | length 17.4
  Top w0.15: v4(6.25,3.55) R46.6
  Top w0.152: v4(17.626,7.475) 18.325,7.475 18.35,7.45 U1.H5
  L3 w0.152: v4(6.25,3.55) 6.25,3.225 7.224,2.251 9.61,2.251 9.86,2.001 12.796,2.001 13.066,2.271 13.098,2.271 14.934,2.271 14.935,2.273 15.098,2.273 15.773,2.948 15.773,5.979 17.269,7.475 v4(17.626,7.475)
DIO1_SX: R46.3 U9.9 | length 1.3
  Top w0.15: U9.9 6.125,5.1 6.25,4.975 R46.3
DIO2: R46.7 U1.H4 | length 16.8
  Top w0.15: v4(6.65,3.55) R46.7
  Top w0.152: v4(17.626,7.875) 18.327,7.875 U1.H4
  L3 w0.152: v4(6.65,3.55) 6.65,3.225 7.35,2.525 9.704,2.525 9.975,2.254 12.691,2.254 12.962,2.524 14.829,2.524 14.83,2.525 14.85,2.525 15.52,3.195 15.52,6.083 17.312,7.875 v4(17.626,7.875)
DIO2_SX: R46.2 U9.10 | length 1.3
  Top w0.15: R46.2 6.65,4.95 6.775,5.075 U9.10
DIO3: R46.8 U1.H3 | length 15.7
  Top w0.15: v4(7.05,3.55) R46.8 ; v2(16.551,8) 16.825,8.275 U1.H3
  L3 w0.15: v4(7.05,3.55) 7.125,3.475 8.95,3.475 9.375,3.05 14.4,3.05 14.975,3.625 14.975,6.365 16.551,7.941 v2(16.551,8)
DIO3_SX: R46.1 U9.11 | length 1.4
  Top w0.15: R46.1 7.05,4.725 7.425,5.1 U9.11
DIO4: R4.2 U1.F3 | length 17.2
  Top w0.15: v2(8.075,3.15) R4.2
  Bottom w0.15: v2(8.075,3.15) 8.075,2.625 8.3,2.4 15.775,2.4 16.125,2.75 16.125,7.025 17.375,8.275 v2(19.175,8.275)
DIO4_SX: R4.1 U9.12 | length 1.3
  Top w0.15: R4.1 U9.12
DIO5: R3.2 U1.G2 | length 15
  Top w0.15: v2(8.725,3.15) R3.2
  L3 w0.15: v2(8.725,3.15) 9.075,2.8 9.8,2.8 10.025,2.575 11.875,2.575 12.075,2.775 14.725,2.775 15.269,3.319 15.269,6.194 17.75,8.675 v4(18.775,8.675)
DIO5_SX: R3.1 U9.13 | length 1.3
  Top w0.15: R3.1 U9.13
GND: ANT1.2 ANT1.3 C1.2 C2.2 C3.1 C4.2 C5.2 C6.2 C7.2 C8.2 C9.1 C10.2 C11.2 C12.1 C13.1 C14.1 C15.1 C16.1 C17.1 C18.1 C42.2 C43.1 C52.1 C53.1 C57.1 C58.1 C59.1 C62.1 C63.1 C64.1 C65.1 C66.1 C67.1 C68.1 C69.1 C70.1 C72.1 C73.1 C75.1 C76.1 C77.1 C81.1 C82.1 C87.1 C88.1 J1.1 J1.25 J2.2 J2.4 J3.2 J3.9 J4.2 J5.2 L4.1 R48.2 U1.C4 U1.C5 U1.D2 U1.E3 U1.F5 U2.2 U8.2 U9.15 U9.23 U9.26 U9.29 U10.2 U11.3 U13.2 X1.2 X1.4 X3.2 X3.4 | length 49.2
  Top w0.1: U9.29@6.775,10.475 v3(6.825,10.425)
  Top w0.127: U1.E3 19.715,8.415 19.715,8.422 19.898,8.606 19.906,8.606 U1.D2
  Top w0.15: v1(7.625,13.725) C69.1 C70.1 ; C67.1 v1(7.625,15.575)
  Top w0.152: U1.D2 20.308,9.008 20.308,9.828 v1(20.137,9.999)
  Top w0.2: v6(22.544,6.935) 22.667,7.058 C9.1
  Top w0.203: U1.F5 19.651,7.475 v8@19.775,7.599 ; U1.E3 19.575,7.799 v8@19.775,7.599 ; U1.C5 19.899,7.475 v8@19.775,7.599 ; U1.C4 20.051,7.875 v8@19.775,7.599
  Top w0.25: X3.4@1.25,5.35 1.975,6.075 2.275,6.075 2.7,6.5 X3.2 ; X3.4 X3.4@1.4,5.318 ; L4.1 v1(3.65,12.25) ; 10.45,16.975 C76.1 ; 10.525,15.675 C75.1 ; 16.225,6.675 C5.2 ; C11.2 C10.2 ; v1(20.75,13.125) 21.145,13.125 C7.2
  Top w0.254: U9.29 v3(8.025,8.025) v3(9.225,6.825) 9.375,6.675 U9.15 ; C3.1@20.01,10.563 20.01,10.126 v1(20.137,9.999) ; C1.2@21.038,11.245 21.195,11.245 21.425,11.475 X1.4 21.95,11.875 C2.2 ; C6.2@23.097,8.891 23.534,8.891 ; v1(23.3,9.65) X1.2
  Top w0.3: J4.2@1.25,22.65 J4.2@4.2,22.65 ; U9.29@6.775,10.475 U9.26 ; U9.23 8.725,10.925 v3(9.225,10.425) ; J5.2@10.792,20.625 J5.2@10.792,23.575
  Top w0.4: X3.4 1.4,4.35 C52.1
  Top w0.5: v3(11.726,7.15) 12,7.15 12.275,6.875 C12.1 U2.2
  Top w0.6: J2.2 1.45,9.5 ; 13.2,24.45 ANT1.2 ; ANT1.3@23.225,23.65 24.375,23.65 ; 25.6,3.525 25.625,3.5 J3.2 ; 25.675,10.5 J3.9
  Bottom w0.4: v3(5.625,8.025) v3(6.825,8.025) v3(6.825,6.825) ; v3(5.625,9.225) v3(6.825,9.225) v3(6.825,10.425) ; v3(8.025,6.825) v3(8.025,8.025) v3(9.225,8.025) ; v3(8.025,10.425) v3(8.025,9.225) v3(9.225,9.225)
  other v1: 1.25,2.25 2.25,2.25 0.75,3.25 1.75,3.25 12.25,4.25 13.25,4.25 14.25,4.25 25.25,4.25 14.25,10.25 18.29,10.971 3.75,11.25 10.75,11.25 13.75,11.25 15.75,11.25 16.75,11.25 24.75,11.25 19.391,11.544 18.316,11.624 19.312,12.193 14.25,12.25 15.25,12.25 16.25,12.25 17.25,12.25 24.25,12.25 25.25,12.25 18.379,12.275 19.312,12.847 18.379,12.929 11.75,13.25 13.75,13.25 14.75,13.25 15.75,13.25 16.75,13.25 17.75,13.25 22.75,13.25 23.75,13.25 24.75,13.25 25.75,13.25 19.312,13.501 18.379,13.583 19.312,14.155 1.25,14.25 13.25,14.25 14.25,14.25 15.25,14.25 16.25,14.25 17.25,14.25 18.379,14.237 22.925,14.617 19.696,14.684 20.35,14.684 21.004,14.684 21.658,14.684 23.57,14.725 18.404,14.891 0.75,15.25 9.75,15.25 13.75,15.25 14.75,15.25 15.75,15.25 16.75,15.25 17.75,15.25 18.762,15.438 19.391,15.616 20.045,15.616 20.699,15.616 21.353,15.616 23.159,15.733 22.506,15.777 2.25,16.25 13.25,16.25 14.25,16.25 15.25,16.25 16.25,16.25 17.25,16.25 18.25,16.25 19.25,16.25 20.25,16.25 21.25,16.25 24.25,16.25 13.7,17 14.3,17 14.9,17 15.5,17 16.1,17 16.7,17 17.3,17 17.9,17 18.5,17 19.1,17 19.7,17 20.3,17 20.9,17 21.5,17 22.1,17 22.7,17 23.3,17 23.9,17 0.75,17.25 3.75,17.25 9.75,17.25 13.1,17.3 24.4,17.6 13.09,17.9 24.4,18.2 1.25,18.25 2.25,18.25 13.1,18.6 24.4,18.8 13.1,19.2 0.75,19.25 24.4,19.4 13.1,19.8 24.4,20 4.25,20.25 13.1,20.4 24.4,20.6 13.1,21 24.4,21.2 13.1,21.6 2.25,22.25 5.25,22.25 10.25,22.25 11.25,22.25 12.449,22.379 2.75,23.25 12.816,23.483 7.365,24.092 8.016,24.155 9.268,24.159 1.25,24.25 2.25,24.25 3.25,24.25 4.25,24.25 12.627,24.763 6.956,25.102 9.44,25.091 10.094,25.091 10.748,25.091 11.402,25.091 12.056,25.083 7.602,25.208
  other v3: 5.625,6.825 5.625,10.425
  other v8: 19.624,7.598
MISO_SX: R50.3 U9.17 | length 1.3
  Top w0.15: U9.17 11.05,7.975 11.15,8.075 R50.3
MOSI_SX: R50.2 U9.18 | length 1.4
  Top w0.15: U9.18 11.075,8.625 11.225,8.475 R50.2
NetANT1_1: ANT1.1 C17.2 R2.2 | length 8.2
  Top w0.108: R2.2 ccw(c7.5,24.65) 7.5,24.625 C17.2 11.95,24.625 cw(c11.95,24.225) 12.35,24.225 12.35,23.275 ccw(c12.875,23.275) 12.875,22.75 14.15,22.75 cw(c14.15,22.7) ANT1.1
NetANT2_1: ANT2.1 C18.2 L13.2 | length 3.8
  Top w0.108: L13.2 C18.2 25.575,15.175 ccw(c25.575,15.6) 26,15.6 ANT2.1
NetC3_2: C3.2 L1.1 U1.D1 | length 3.3
  Top w0.203: L1.1@18.842,10.538 18.984,10.538 19.861,11.416 C3.2@20.01,11.416 ; L1.1@18.887,10.386 19.975,9.298 U1.D1
NetC14_2: C14.2 U9.5 X3.3 | length 3.6
  Top w0.1: X3.3 1.4,7 C14.2
  Top w0.15: C14.2 U9.5
NetC16_2: C16.2 R2.1 U13.3 | length 2.8
  Top w0.108: U13.3 5.45,23.75 cw(c5.625,23.75) 5.625,23.925 5.625,24.625 cw(c5.65,24.625) C16.2 ; C16.2 R2.1
NetC52_2: C52.2 U9.6 X3.1 | length 4.8
  Top w0.2: C52.2 2.7,4.35 X3.1 3.35,5.2 3.55,5.4 3.55,6.9 3.975,7.325 U9.6
NetC54_2: C54.2 C55.2 | length 0.7
  Top w0.108: C55.2 2.025,12.05 cw(c2.025,11.95) C54.2
NetC55_1: C55.1 C56.2 | length 0.6
  Top w0.108: C55.1 cw(c1.525,12.75) 1.525,12.775 C56.2
NetC56_1: C56.1 U8.1 | length 4
  Top w0.108: U8.1 1.625,14.55 ccw(c1.875,14.55) 1.875,14.3 cw(c1.875,14.05) 2.125,14.05 C56.1
NetC58_2: C58.2 U9.2 | length 1.6
  Top w0.15: C58.2 U9.2
NetC59_2: C59.2 U9.4 | length 2.1
  Top w0.15: C59.2 U9.4
NetC60_1: C60.1 J4.1 | length 1.2
  Top w0.108: J4.1 3.05,20.8 C60.1
NetC60_2: C60.2 U8.5 | length 1
  Top w0.108: U8.5 C60.2@2.275,20.1
NetC61_1: C61.1 C62.2 L5.2 L6.1 | length 2.4
  Top w0.108: L5.2 2.95,13.85 ccw(c2.925,13.85) C62.2 L6.1 3.525,14.7 ccw(c3.525,14.825) C61.1
NetC61_2: C61.2 C63.2 L6.2 U8.3 | length 2.4
  Top w0.108: U8.3 C63.2 L6.2 ccw(c3.05,15.65) 3.05,15.525 C61.2
NetC65_2: C65.2 U8.4 U11.4 | length 4.6
  Top w0.15: U8.4 C65.2 5.45,19.125 6.125,18.45 U11.4
NetC66_2: C66.2 C67.2 C68.2 L7.1 L8.2 U9.25 | length 10.6
  Top w0.108: L7.1 6.025,14.1 cw(c6.025,13.95) 6.175,13.95 ccw(c6.325,13.95) 6.325,13.8 C66.2 ; U9.25 7.425,12.45 ccw(c7.2,12.45) 7.2,12.675 6.925,12.675 cw(c6.925,12.875) 6.725,12.875 C66.2 ; C68.2 ccw(c8.35,16.125) 8.325,16.125 C67.2 9.1,15.125 cw(c9.1,14.725) 9.5,14.725 L8.2 ccw(c9.225,14.075) 9.225,14.35 7.45,14.35 ccw(c7.45,14.15) 7.25,14.15 7.25,14 cw(c7.05,14) 7.05,13.8 C66.2
NetC71_1: C71.1 C75.2 L9.2 L10.1 | length 2.4
  Top w0.108: C71.1 11.7,16.625 cw(c11.7,16.5) L10.1 C75.2 L9.2
NetC71_2: C71.2 C76.2 L10.2 U10.1 | length 3.7
  Top w0.108: U10.1 C76.2 11.6,18.175 cw(c11.6,17.95) 11.825,17.95 L10.2 11.225,17.45 ccw(c11.225,17.325) C71.2
NetC74_1: C74.1 L9.1 | length 1.1
  Top w0.108: C74.1 L9.1
NetC78_1: C78.1 U13.5 | length 0.9
  Top w0.108: C78.1 U13.5
NetC78_2: C78.2 U10.5 | length 2.3
  Top w0.108: C78.2 6.1,19.05 ccw(c6.325,19.05) 6.325,18.825 U10.5
NetC79_1: C79.1 C80.2 | length 6.7
  Top w0.108: C80.2 12.025,19.475 cw(c12.025,18.95) 12.55,18.95 C79.1
NetC79_2: C79.2 C81.2 L11.2 | length 1.6
  Top w0.108: L11.2 C81.2 C79.2
NetC80_1: C80.1 U10.3 | length 1
  Top w0.108: U10.3 C80.1
NetJ5_1: J5.1 U13.1 | length 3.2
  Top w0.1: U13.1 7.725,23.1 cw(c7.725,22.775) 8.05,22.775 8.05,22.425 ccw(c8.375,22.425) 8.375,22.1 J5.1
NetL2_1: L2.1 L3.2 | length 1.4
  Top w0.203: L2.1@23.476,6.021 24.343,5.154 L3.2@24.503,5.154
NetL12_2: L12.2 U2.5 | length 1.3
  Top w0.5: U2.5 L12.2
NFC1: C42.1 J1.9 U1.G6 | length 15.7
  Top w0.15: J1.9@9.6,-0.15 C42.1 v2(9.6,1.8)
  L4 w0.152: v2(9.6,1.8) 9.6,1.875 9.8,2.075 13.2,2.075 13.875,2.75 18.45,2.75 18.775,3.075 v5(18.775,7.075)
NFC2: C43.2 J1.8 U1.G5 | length 16.4
  Top w0.152: J1.8 C43.2 v2(8.5,1.925)
  L4 w0.152: v2@8.575,1.925 8.977,2.327 12.852,2.327 13.675,3.15 17.675,3.15 18.375,3.85 18.375,7.136 18.714,7.475 v5(18.775,7.475) v5@18.775,7.401
NRESET: J1.5 R5.2 U1.H2 | length 24.1
  Top w0.152: v2(16.151,8) 16.151,8.062 16.764,8.675 U1.H2
  Top w0.2: v4(4.475,3.25) R5.2
  L3 w0.2: v4(4.475,3.25) 5.875,1.85 v2@5.875,1.475
  Bottom w0.152: J1.5 5.5,1.125 5.85,1.475 6.75,1.475 7.425,2.15 7.425,2.961 7.94,3.476 9.274,3.476 10.025,2.725 15.6,2.725 15.874,2.999 15.874,7.129 16.151,7.406 v2(16.151,8)
  other v2: 5.875,1.45
NRESET_SX: R5.1 U9.7 | length 2
  Top w0.2: R5.1 U9.7
NSS_SX: R50.1 U9.19 | length 1.5
  Top w0.15: U9.19 11.025,9.275 11.425,8.875 R50.1
P0.02: J1.16 U1.C6 | length 10.1
  L4 w0.152: J1.16 16.5,1.275 16.8,1.575 19.175,1.575 20.375,2.775 v5(20.375,7.075)
P0.03: J1.15 U1.D6 | length 10.7
  L4 w0.152: J1.15 15.5,1.3 16.05,1.85 19.05,1.85 19.975,2.775 v5(19.975,7.075)
P0.04: J1.14 U1.E6 | length 11.3
  L4 w0.15: J1.14 14.5,1.375 15.275,2.15 18.925,2.15 19.6,2.825 v5@19.6,7.075
  other v5: 19.575,7.075
P0.05: J1.13 U1.E7 | length 11.4
  Top w0.152: v1(17.1,4.65) 17.325,4.875 18.1,4.875 19.575,6.35 U1.E7
  L3 w0.152: J1.13 13.5,1.175 13.589,1.264 15.351,1.264 15.352,1.265 16.515,1.265 16.95,1.7 16.95,4.5 v1(17.1,4.65)
P0.06: J1.12 U1.F7 | length 12
  Top w0.152: v1(16.875,5.225) 17.925,5.225 19.175,6.475 U1.F7
  L3 w0.152: J1.12 12.5,1.025 12.721,1.246 13.109,1.246 13.11,1.248 13.215,1.248 13.484,1.517 15.246,1.517 15.247,1.518 16.293,1.518 16.625,1.85 16.625,4.975 v1(16.875,5.225)
P0.07: J1.11 U1.F6 | length 13.9
  L4 w0.152: J1.11 11.5,1.3 11.95,1.75 13.4,1.75 14.075,2.425 18.8,2.425 19.175,2.8 v5(19.175,7.075)
P0.08: J1.10 U1.G7 | length 13.6
  Top w0.152: v1(16.5,5.75) 17.975,5.75 18.775,6.55 U1.G7
  L3 w0.152: J1.10 10.5,1.15 10.849,1.499 13.004,1.499 13.274,1.769 15.142,1.769 15.143,1.77 15.67,1.77 16.275,2.375 16.275,5.525 v1(16.5,5.75)
P0.11: J1.17 U1.F4 | length 8.6
  Bottom w0.15: J1.17 17.5,1.7 18.175,2.375 18.175,6.875 v2(19.175,7.875)
P0.12: J1.7 U1.H6 | length 16.2
  Top w0.15: v4(17.625,7.075) U1.H6
  L3 w0.15: J1.7 7.5,0.975 7.85,1.325 10.2,1.325 10.625,1.75 12.9,1.75 13.17,2.02 15.038,2.02 15.039,2.021 15.271,2.021 16.024,2.774 16.024,5.875 17.224,7.075 v4(17.625,7.075)
P0.17: J1.6 U1.G3 | length 19.8
  Top w0.15: J1.6 v2(6.5,2.4)
  L4 w0.152: v2(12.5,3.525) 12.775,3.525 13.05,3.8 15.55,3.8 16.05,4.3 16.05,6.775 17.55,8.275 v5(18.775,8.275)
  Bottom w0.152: v2(6.5,2.4) 6.5,3.65 7.05,4.2 10.077,4.2 10.428,3.849 11.901,3.849 12.225,3.525 v2(12.5,3.525)
P0.21: J1.4 R45.1 R47.1 R48.1 U1.H1 | length 24.7
  Top w0.1: R48.1 3.775,2.525 ; R45.1 3.775,2.525 ; R47.1 3.775,2.525
  Top w0.152: R47.1 4.85,2.2 v2(5.125,1.925) ; v2(15.751,8) 15.751,8.201 16.625,9.075 U1.H1
  Bottom w0.152: J1.4 4.5,1.325 5.1,1.925 v2(5.125,1.925) 6.575,1.925 7.05,2.4 7.05,3.25 7.65,3.85 9.45,3.85 10.175,3.125 15.25,3.125 15.622,3.497 15.622,7.871 v2(15.751,8)
P0.22: R50.8 U1.F2 | length 7.2
  Top w0.15: R50.8 v4@13.425,8.875
  L4 w0.152: v4(13.525,8.875) 17.982,8.875 18.132,9.025 19.05,9.025 19.175,8.9 v5(19.175,8.677)
P0.23: J3.6 R50.7 U1.E2 | length 15.6
  Top w0.15: R50.7 v2(12.625,8.475)
  Bottom w0.15: v2(12.625,8.475) 12.675,8.525 18.853,8.525 19.053,8.725 v2(19.575,8.726) ; v2(19.575,8.726) 19.824,8.975 22.35,8.975 22.65,8.675 24.475,8.675 25.65,7.5 J3.6
P0.24: J3.5 R50.6 U1.E1 | length 17.8
  Top w0.15: R50.6 v4(12.625,8.075)
  Top w0.152: v4(19.575,9.2) v4@19.575,9.218
  L3 w0.152: v4(12.625,8.075) 13.2,8.075 13.925,8.8 v2(13.925,9.425)
  L4 w0.152: v2(13.925,9.425) 13.925,9.575 14.125,9.775 14.925,9.775 15.425,9.275 18.025,9.275 18.501,9.751 19.274,9.751 19.575,9.45 v4(19.575,9.2) 20.575,9.2 21.2,8.575 23.825,8.575 25.9,6.5 J3.5
P0.25: J3.4 R50.5 U1.B3 | length 26.1
  Top w0.15: R50.5 v4(12.625,7.675)
  L3 w0.15: v4(12.625,7.675) 13.5,7.675 14.375,8.55 v2(14.375,9.325) ; v1(25.025,10.025) 25.2,9.85 v1(25.2,6.2)
  L4 w0.152: v5(20.775,8.275) 20.801,8.301 23.574,8.301 25.025,6.85 25.025,6.375 v1(25.2,6.2) 25.9,5.5 J3.4
  Bottom w0.15: v2(14.375,9.325) 15,9.95 18.77,9.95 19.194,10.374 20.293,10.374 20.317,10.35 24.7,10.35 v1(25.025,10.025)
P0.26: J3.3 U1.D3 | length 9.9
  Bottom w0.152: v2(20.028,8.292) 24.358,8.292 25.65,7 25.65,4.75 25.9,4.5 J3.3
P0.27: J1.22 U1.B4 U13.4 | length 34.3
  Top w0.2: v7(5.45,20.5) U13.4
  L3 w0.152: v1(9.875,16.55) 11.325,15.1 11.325,14.4 15.974,9.751 18.91,9.751 18.911,9.75 19.784,9.75 19.961,9.573 20.002,9.573 20.354,9.221 20.354,8.234 20.714,7.875 v2(20.775,7.875)
  L4 w0.152: v7(5.45,20.5) 5.45,17.75 6.65,16.55 v1(9.875,16.55) ; v2(20.775,7.875) v2@20.796,7.896
  Bottom w0.152: v2@20.796,7.896 22.354,7.896 23.575,6.675 23.575,3.85 22.5,2.775 J1.22@22.5,0.025
P0.28: J1.21 U1.A3 | length 11.7
  Top w0.152: U1.A3 23.05,8.275 v4(23.35,7.975)
  L4 w0.152: J1.21 21.5,1.725 24.1,4.325 24.1,7.225 v4(23.35,7.975)
P0.29: J1.20 U1.A4 | length 11.4
  L4 w0.152: J1.20 20.5,1.25 23.825,4.575 23.825,7 22.95,7.875 v4(21.175,7.875)
P0.30: J1.19 U1.A5 | length 11.6
  Top w0.152: U1.A5 v4(21.675,7.475)
  L4 w0.152: J1.19 19.5,1.475 22.45,4.425 23.225,4.425 23.55,4.75 23.55,6.8 22.875,7.475 v4(21.675,7.475)
P0.31: J1.18 U1.B5 | length 9.1
  L3 w0.152: J1.18 18.5,1.25 21.45,4.2 21.45,7.075 21.05,7.475 v5(20.775,7.475)
RF: C13.2 L1.2 L13.1 | length 7.9
  Top w0.108: L1.2 18.845,14.695 cw(c19.3,14.695) 19.3,15.15 C13.2 cw(c22.225,15.15) 22.225,15.175 L13.1
RFI_HF: L11.1 U9.21 | length 2.1
  Top w0.108: U9.21 11.675,10.575 ccw(c11.675,10.7) 11.8,10.7 L11.1
RFI_LF: C54.1 L4.2 U9.1 | length 3
  Top w0.108: C54.1@2.125,11.3 L4.2 2.95,10.75 ccw(c3.125,10.75) 3.125,10.575 U9.1
RFO_HF: C74.2 C77.2 L8.1 U9.22 | length 3
  Top w0.108: U9.22 9.375,12.175 cw(c9.45,12.175) 9.45,12.25 ccw(c9.45,12.3) 9.5,12.3 L8.1 C77.2 C74.2
RFO_LF: C64.2 L5.1 L7.2 U9.28 | length 3.1
  Top w0.108: L5.1 C64.2 L7.2 U9.28
RXTX_RF_SX: R44.1 U9.20 | length 1.3
  Top w0.15: U9.20 R44.1
RXTX_SW: C82.2 R44.2 R47.2 U10.4 U11.2 | length 32.5
  Top w0.15: v1@5.2,3.225 5.55,2.875 R47.2 ; v4(5.475,14.8) U11.2 ; v1(6.725,19.475) U10.4 7.675,19.775 C82.2 ; R44.2 v4(13.025,9.925)
  L3 w0.15: v1(6.725,19.475) 5.775,19.475 5.475,19.175 v4(5.475,14.8) 5.475,13.625 7.05,12.05 11.925,12.05 13.025,10.95 v4(13.025,9.925)
  L4 w0.15: v1(5.2,3.25) 5.15,3.3 5.15,14.475 v4(5.475,14.8)
SCK_SX: R50.4 U9.16 | length 1.4
  Top w0.15: U9.16 11.025,7.325 11.375,7.675 R50.4
SWDCLK: J3.7 U1.F1 | length 8.5
  Top w0.152: U1.F1 v2(19.175,9.375)
  Bottom w0.152: v2(19.175,9.375) 19.325,9.225 19.719,9.225 19.72,9.226 22.454,9.226 22.73,8.95 24.65,8.95 25.1,8.5 J3.7
SWDIO: J3.8 U1.G1 | length 9.1
  Top w0.152: U1.G1 v2(18.775,9.425)
  Bottom w0.152: v2(18.775,9.425) 18.775,9.6 18.876,9.701 19.725,9.701 19.948,9.479 22.559,9.479 22.787,9.25 23.65,9.25 23.9,9.5 J3.8
VDD: C5.1 C8.1 C12.2 J1.2 J1.24 J2.1 J2.5 J3.1 J3.10 L12.1 U1.A7 U1.H7 U2.1 U2.3 | length 10.3
  Top w0.108: U2.1 ccw(c13.725,5.825) U2.1@13.775,5.825 ; C12.2@13.725,6.825 cw(c13.775,6.825) C12.2 ; 14.6,5.775 14.625,5.8
  Top w0.203: C5.1 U1.H7 ; C8.1@22.112,4.842 22.224,4.954 v6(23.026,4.954)
  Top w0.254: U1.A7 21.299,6.551 21.299,5.386 21.843,4.842 C8.1@22.112,4.842
  Top w0.3: U2.3 v1(11.825,6.5) ; v1(17.45,6.2) C5.1
  Top w0.5: C12.2@13.725,6.825 U2.1 14.6,5.775 ; C12.2 14.375,6.875 14.575,7.075 v3(14.575,7.55) ; 14.625,5.8 15.05,5.375 L12.1
VDD_SX1276: C15.2 C53.2 C57.2 C69.2 C70.2 C72.2 C73.2 C87.2 C88.2 R45.2 U2.4 U8.6 U9.3 U9.14 U9.24 U10.6 U11.5 U13.6 | length 18.6
  Top w0.15: v1(1.575,20.7) 1.4,20.525 C53.2 1.625,19.775 U8.6 ; v2(3.325,9.05) 3.075,9.05 C57.2 ; v2(3.325,9.525) 3.1,9.525 C57.2 ; U9.3 C57.2 ; U11.5 C87.2 v1(4.825,18.65) ; v1(7.55,17) C73.2 7.675,17.625 U10.6 ; v1(7.6,20.475) C88.2 ; v2(7.825,12.5) 7.825,12.775 C69.2 8.35,12.75 v2(8.35,12.5) ; C72.2 U9.14 ; v3@10.575,4.375 v3(10.625,4.325)
  Top w0.2: R45.2 v1(3.075,3.8) ; U13.6 ccw(c6.775,21.2) 6.775,21.175 C88.2 ; U9.24 C69.2 C70.2
  Top w0.4: C72.2 v3@10.575,4.375
  Top w0.5: v3(10.625,5.075) v3(10.625,4.325) C15.2 U2.4
XC1: C1.1 U1.B2 X1.1 | length 2.6
  Top w0.152: U1.B2 20.867,8.767 20.867,9.842 21,10.05 C1.1 ; C1.1@21.038,10.545 X1.1@21.714,10.545
XC2: C2.1 U1.A1 X1.3 | length 4.6
  Top w0.152: U1.A1 21.178,9.075 21.914,9.811 22.486,9.811 22.6,9.925 22.6,10.882 X1.3@23.213,11.495 ; C2.1@23.014,12.368 23.363,12.018 X1.3@23.363,11.495
XL1: C10.1 U1.D7 X2.1 | length 3.2
  Top w0.152: C10.1@18.398,4.395 18.847,4.395 19.648,5.196 19.975,5.523 U1.D7
XL2: C11.1 U1.C7 X2.2 | length 4.8
  Top w0.152: C11.1@18.398,3.684 19.586,3.684 19.648,3.746 19.787,3.746 20.588,4.548 20.588,6.148 20.375,6.361 U1.C7
pads on no net: ANT2.NC Fid1.0 J1.3 J1.23 J2.3 U1.C3 U9.27 U11.1

## Polygon pours and split planes (outlines as drawn)
GND on Top "Top-GND" (solid, remove dead copper, pour order 4): 0,0 27,0 27,25.5 0,25.5
GND on Bottom "Bottom-GND" (solid, remove dead copper, pour order 6): 0,0 27,0 27,25.5 0,25.5
GND on L2 (GND) (split plane): 26.898,0.102 0.102,0.102 0.102,25.398 26.898,25.398
VDD_SX1276 on L5 (PWR) (split plane): 11.148,3.527 1.352,3.527 1.352,22.073 11.148,22.073
VDD on L5 (PWR) (split plane): 26.898,0.102 0.102,0.102 0.102,25.398 26.898,25.398

## Other copper
Top:
  pour cut-out: 20.366,8.608 20.366,9.593 19.807,10.151 19.807,10.863 20.366,10.863 20.366,11.925 18.334,11.925 18.334,8.608
  text ".Layer_Name" at 20.05,-5.675 h0.5
L3:
  pour cut-out: 21.046,8.487 21.046,11.925 18.252,11.925 18.252,8.487
  text ".Layer_Name" at 20.05,-5.65 h0.5
L4:
  text ".Layer_Name" at 20.05,-5.65 h0.5
Bottom:
  text ".Layer_Name" at 20.05,-5.65 h0.5
L2 (GND) (plane layer: these items are gaps in the copper):
  pour cut-out: 21.046,9.147 21.046,11.925 18.252,11.925 18.252,9.147
  text ".Layer_Name" at 20.05,-5.65 h0.5
L5 (PWR) (plane layer: these items are gaps in the copper):
  lines w0.2: 1.25,3.425 11.25,3.425 11.25,22.175 1.25,22.175 1.25,3.425
  text ".Layer_Name" at 20.05,-5.65 h0.5
Multi-Layer:
  pour cut-out: 13.35,17.325 13.35,25.6 24.15,25.6 24.15,17.325
  pour cut-out: 25,25.6 27,25.6 27,14.075 25,14.075

## Silkscreen, mask and mechanical layers (free items; w line width, h text height)
Top Overlay:
  text "433MHz" at 1.475,24.6 h0.4
  text "868MHz" at 9.625,24.3 h0.4
Bottom Overlay:
  drawing of 2860 lines, arcs and shapes, not listed
  text "EE-02 v2.1" at 22.059,15.386 h1
Alignment:
  lines w0.01: -0.2,0.5 -0.2,-0.2 0.3,-0.2 ; -0.2,37.8 -0.2,38.875 0.725,38.875 ; 26.45,38.875 27.2,38.875 27.2,38.125 ; 26.775,-0.175 27.2,-0.175 27.2,0.125